# EAGLE board LEDLightSticks_V2--01--Brain_Board_PCB_v17 (EAGLE 9.7.0)
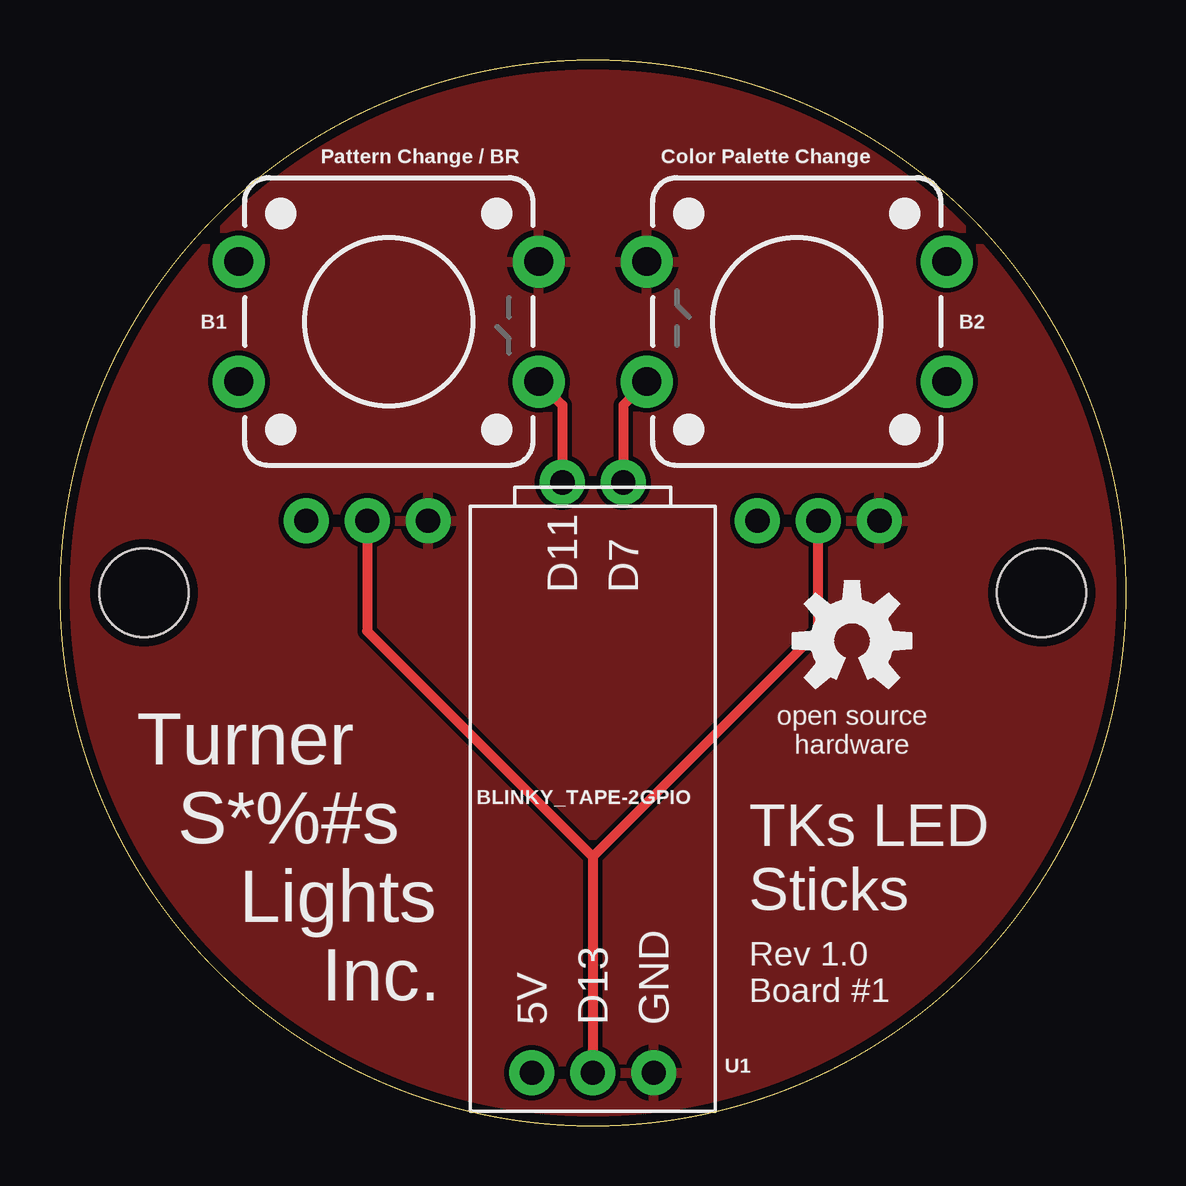
[diagram p0: board, top side]
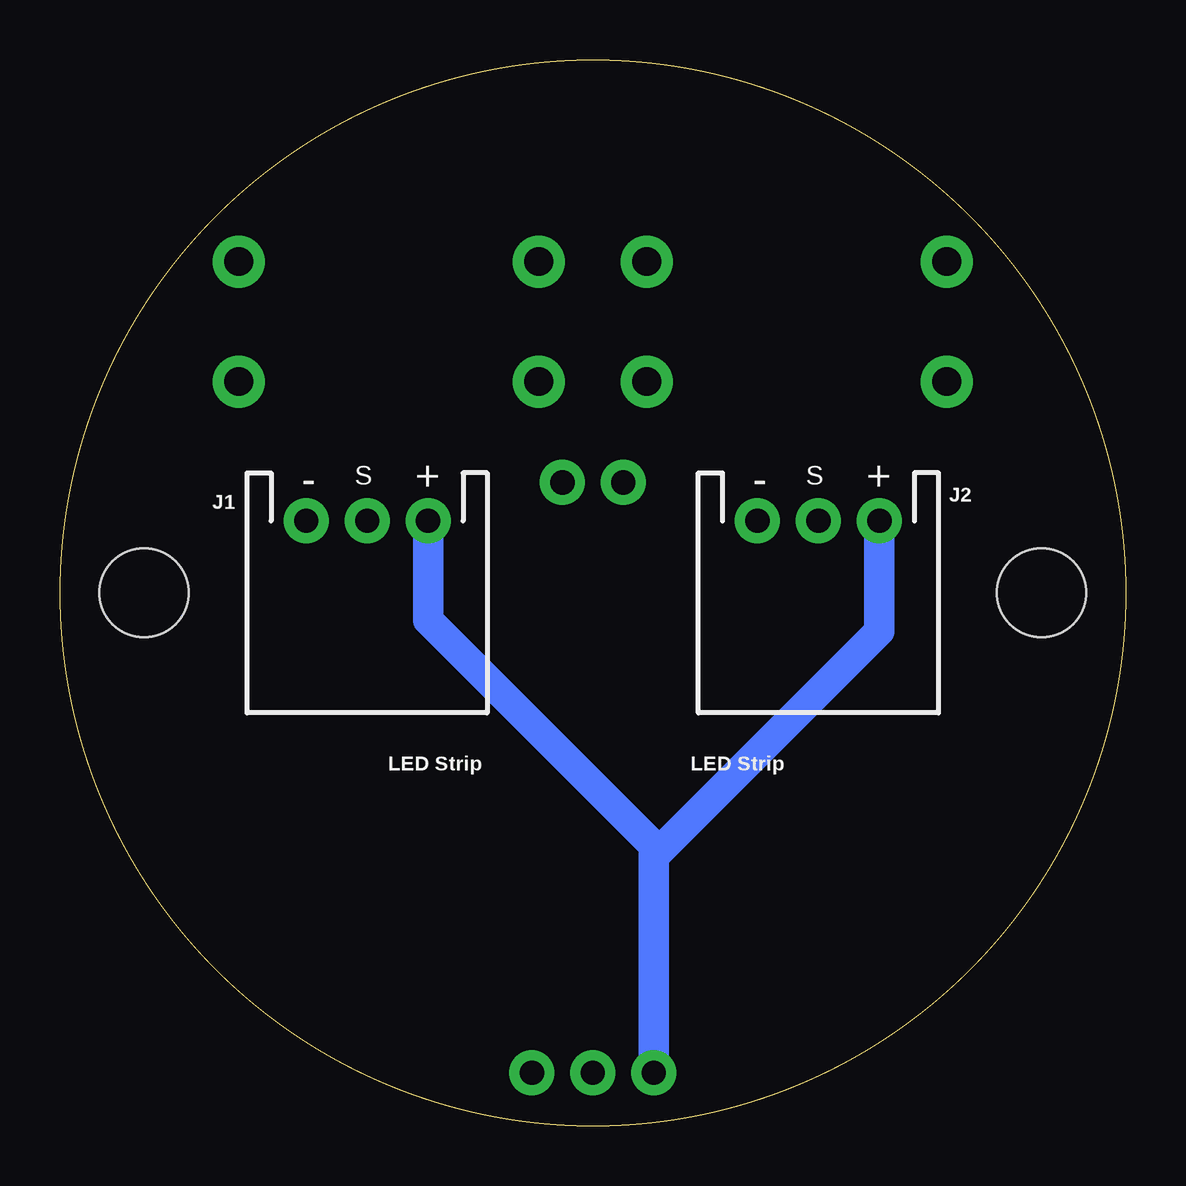
[diagram p1: board, bottom side, seen from below]

Size 44.4 x 44.4 mm. Coordinates in mm from the lower left corner, seen from the top.
Outline: circle at 22.2,22.2 radius 22.2
Copper layers (1*16): Top 0.035mm / dielectric 1.5mm / Bottom 0.035mm
Design rules "TKs_CustomDRU": minimum track width 10mil, minimum drill 20mil, track to track 8mil, track to pad 8mil, pad to pad 8mil, via to via 8mil, smd to smd 8mil, copper to edge 15mil, drill to drill 15mil, minimum pad ring 12mil, minimum via ring 10mil, stop-mask expansion 4mil, vias tented up to drill 20mil, thermal gap 10mil
Holes 3.7 mm at 40.9,22.2 3.5,22.2

## Footprints (pad centres in the part's own frame; a part is rotated, then mirrored left to right if it is on the bottom)
TACTILE_SWITCH_PTH_12MM = drill 1.2 pad 2.159: 1 6.25,-2.5; 2 -6.25,-2.5; 3 6.25,2.5; 4 -6.25,2.5
JST-3-PTH-XH-RA = drill 1.016 pad 1.88: 5V -2.54,0; GND 2.54,0; SIGNAL 0,0
BLINKY_TAPE-2GPIO = drill 1.016 pad 1.88: 5V -2.54,0; D7 1.27,24.6; D11 -1.27,24.6; GND 2.54,0; SIGNAL 0,0

## Placement (x,y rotation side)
B1  Pattern Change / BR  [TACTILE_SWITCH_PTH_12MM]  13.7,33.5 0 top
B2  Color Palette Change  [TACTILE_SWITCH_PTH_12MM]  30.7,33.5 180 top
J1  LED Strip  [JST-3-PTH-XH-RA]  31.6,25.2 180 bottom
J2  LED Strip  [JST-3-PTH-XH-RA]  12.8,25.2 180 bottom
LOGO1  OSHW-LOGOM  [OSHW-LOGO-M]  33,20.2 0 top
U1  BLINKY_TAPE-2GPIO  [BLINKY_TAPE-2GPIO]  22.2,2.2 0 top

## Library data of the parts
B1 B2 = LED_Light_Sticks_Library; PROD_ID: SWCH-09185; SF_SKU: COM-09190
J1 J2 LOGO1 U1 = LED_Light_Sticks_Library

## Nets
GND: B1.3 B2.1 J1.GND J2.GND U1.GND
N$1: J1.SIGNAL J2.SIGNAL U1.SIGNAL
N$2: B1.1 U1.D11
N$5: B2.3 U1.D7
VIN: J1.5V J2.5V U1.5V

## Tracks (layer width: path | path; a pad name or v marks a point on that pad's centre or on a via)
GND
  pour Top: 0.2,0.2 44.2,0.2 44.2,44.2 0.2,44.2
N$1
  Top 0.406: J1.SIGNAL 31.6,20.6 22.2,11.2 | 22.2,11.2 U1.SIGNAL | J2.SIGNAL 12.8,20.6 22.2,11.2
N$2
  Top 0.406: B1.1 20.93,30.02 U1.D11
N$5
  Top 0.406: B2.3 23.47,30.02 U1.D7
VIN
  Bottom 1.27: J1.5V 29.06,21.06 19.66,11.66 19.66,11.2 | 19.66,11.2 U1.5V | J2.5V 10.26,20.6 19.66,11.2

## Text on the board
tPlace: open source / hardware | TKs LED / Sticks | Rev 1.0 / Board #1 | Turner / S*%#s / Lights / Inc.